# EAGLE board picoslidertoy (EAGLE 9.6.2)
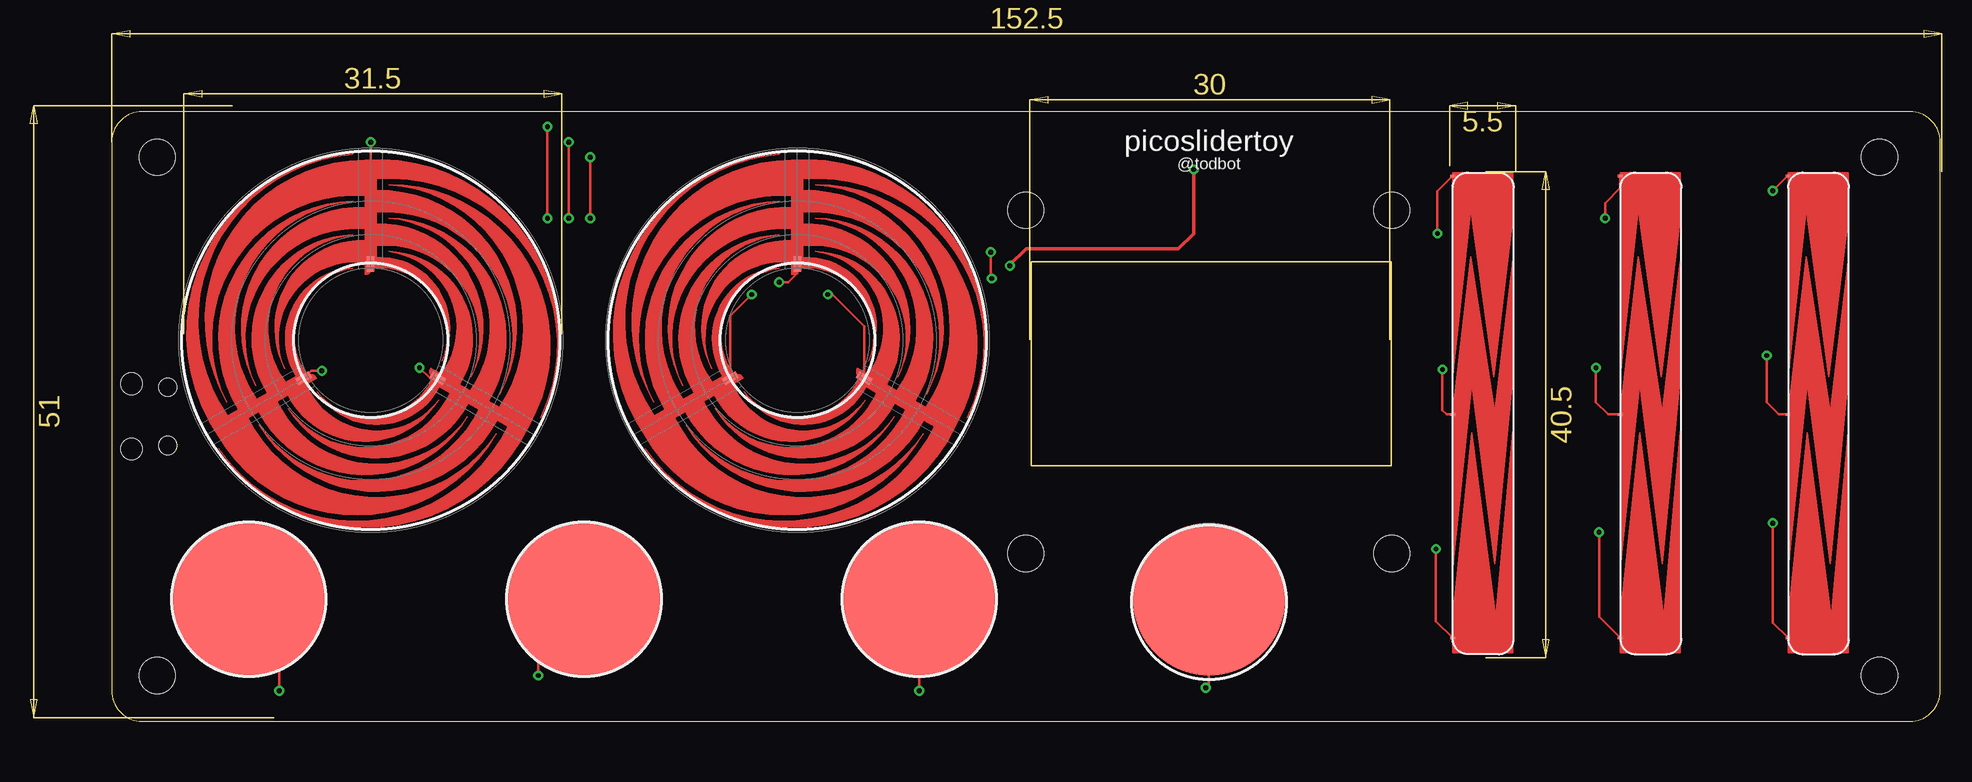
[diagram p0: board, top side]
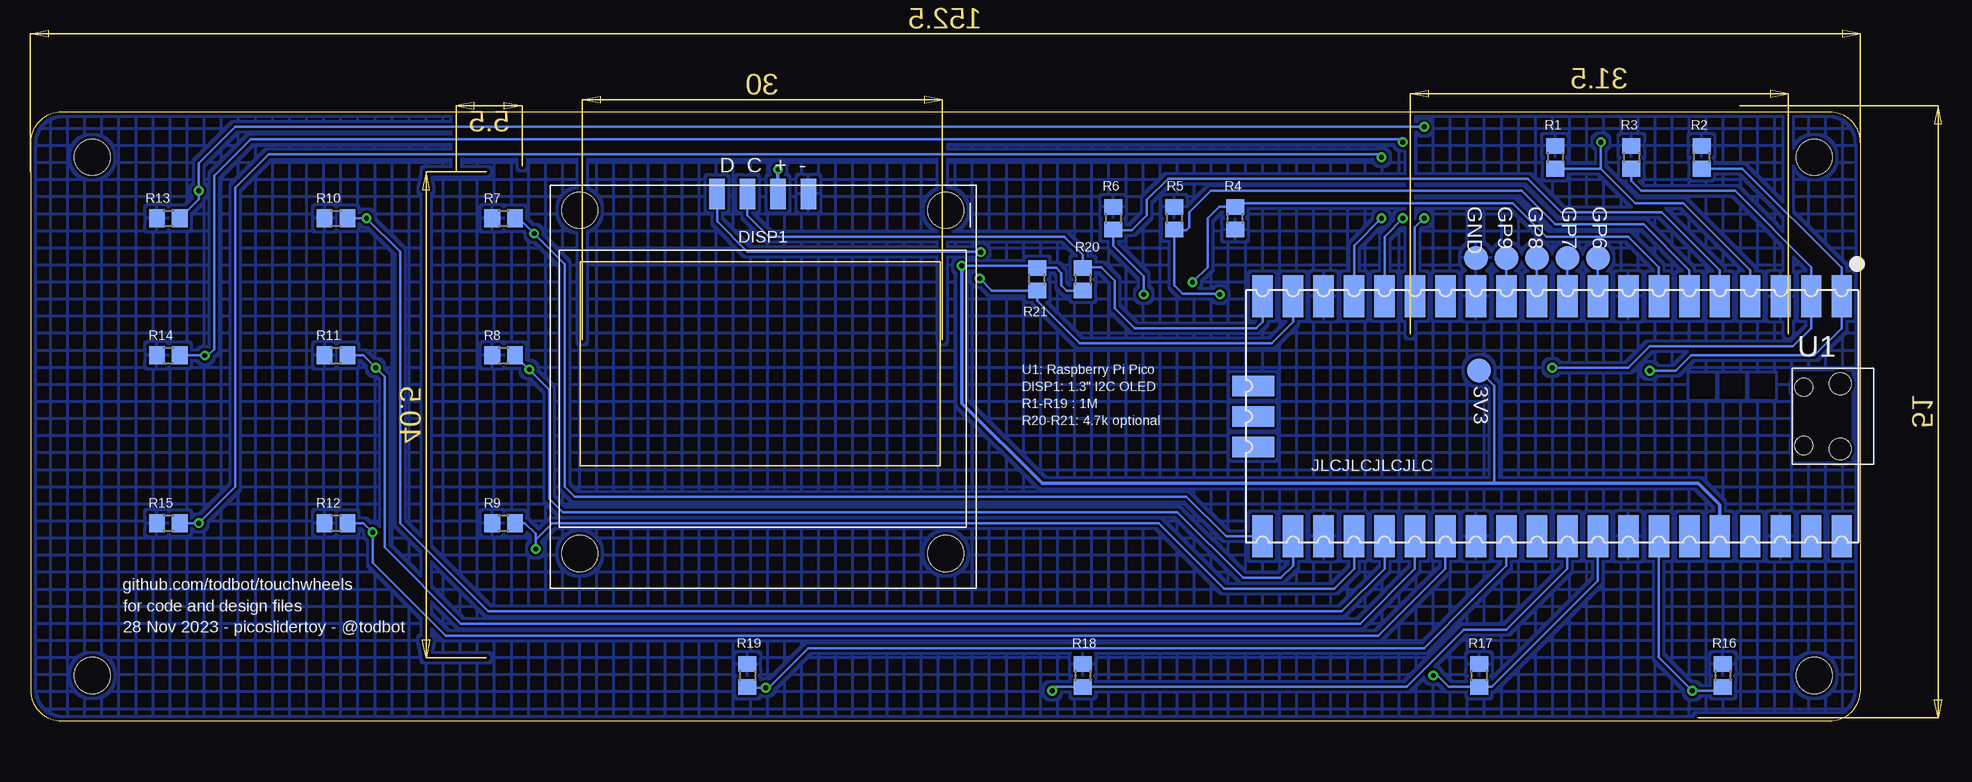
[diagram p1: board, bottom side, seen from below]

Size 152.4 x 50.8 mm. Coordinates in mm from the lower left corner, seen from the top.
Outline: 149.86,50.8 2.54,50.8 arc90 0,48.26 0,2.54 arc90 2.54,0 149.86,0 arc90 152.4,2.54 152.4,48.26 arc90 149.86,50.8
Copper layers (1*16): Top 0.035mm / dielectric 1.5mm / Bottom 0.035mm
Design rules "adafruit-rules-20180530": minimum track width 8mil, minimum drill 16mil, track to track 8mil, track to pad 8mil, pad to pad 8mil, via to via 8mil, smd to smd 8mil, copper to edge 10mil, drill to drill 8mil, minimum pad ring 10mil, minimum via ring 8mil, stop-mask expansion 4mil, vias tented up to drill 20mil, thermal gap 10mil
Holes 3 mm at 147.32,3.81 3.81,46.99 3.81,3.81 147.32,46.99

## Footprints (pad centres in the part's own frame; a part is rotated, then mirrored left to right if it is on the bottom)
TP20R = smd 2 x 2: TP 0,0
R0805 = smd 1.3 x 1.5: 1 -0.95,0; 2 0.95,0
TOUCHSLIDER3_6X40 = smd 0.406 x 0.203: A 0,-0.27; B 0,-20.16; C 0,-38.78
1.3"OLED_SMDBACKONLY = smd 1.27 x 2.54 bottom: GND 0,0.762; SCL 5.08,0.762; SDA 7.62,0.762; VCC 2.54,0.762 | hole 3: 19.05,-0.6; -11.45,-0.6; 19.05,-29.2; -11.45,-29.2
TOUCHROTARY1B = smd 1.27 x 0.635: P0 6.35,0 | smd 1.27 x 0.635 rotated 120: P1 -3.175,5.588 | smd 1.27 x 0.635 rotated 60: P2 -3.175,-5.588
TOUCHPADA_0.5IN = smd 12.7 x 12.7: TP 0,0
PICO-PKG-SMD = smd 3.5 x 1.7: P$1 -10,24.13; P$2 -10,21.59; P$3 -10,19.05; P$4 -10,16.51; P$5 -10,13.97; P$6 -10,11.43; P$7 -10,8.89; P$8 -10,6.35; P$9 -10,3.81; P$10 -10,1.27; P$11 -10,-1.27; P$12 -10,-3.81; P$13 -10,-6.35; P$14 -10,-8.89; P$15 -10,-11.43; P$16 -10,-13.97; P$17 -10,-16.51; P$18 -10,-19.05; P$19 -10,-21.59; P$20 -10,-24.13; P$21 10,-24.13; P$22 10,-21.59; P$23 10,-19.05; P$24 10,-16.51; P$25 10,-13.97; P$26 10,-11.43; P$27 10,-8.89; P$28 10,-6.35; P$29 10,-3.81; P$30 10,-1.27; P$31 10,1.27; P$32 10,3.81; P$33 10,6.35; P$34 10,8.89; P$35 10,11.43; P$36 10,13.97; P$37 10,16.51; P$38 10,19.05; P$39 10,21.59; P$40 10,24.13 | smd 1.7 x 3.5: P$41 -2.54,-24.925; P$42 0,-24.925; P$43 2.54,-24.925 | hole 1.8: -2.725,24; 2.725,24 | hole 1.5: -2.425,20.97; 2.425,20.97

## Placement (x,y rotation side)
3V3  TPTP20R  [TP20R]  31.75,29.21 0 bottom
GND  TPTP20R  [TP20R]  32,38.61 0 bottom
GP6  TPTP20R  [TP20R]  21.84,38.61 0 bottom
GP7  TPTP20R  [TP20R]  24.38,38.61 270 bottom
GP8  TPTP20R  [TP20R]  26.92,38.61 270 bottom
GP9  TPTP20R  [TP20R]  29.46,38.61 270 bottom
R1  1M  [R0805]  25.4,46.99 270 bottom
R2  1M  [R0805]  13.21,46.99 270 bottom
R3  1M  [R0805]  19.05,46.99 270 bottom
R4  1M  [R0805]  52.07,41.91 90 bottom
R5  1M  [R0805]  57.15,41.91 270 bottom
R6  1M  [R0805]  62.23,41.91 270 bottom
R7  1M  [R0805]  113.03,41.91 0 bottom
R8  1M  [R0805]  113.03,30.48 0 bottom
R9  1M  [R0805]  113.03,16.51 0 bottom
R10  1M  [R0805]  127,41.91 0 bottom
R11  1M  [R0805]  127,30.48 0 bottom
R12  1M  [R0805]  127,16.51 0 bottom
R13  1M  [R0805]  140.97,41.91 0 bottom
R14  1M  [R0805]  140.97,30.48 0 bottom
R15  1M  [R0805]  140.97,16.51 0 bottom
R16  1M  [R0805]  11.43,3.81 270 bottom
R17  1M  [R0805]  31.75,3.81 270 bottom
R18  1M  [R0805]  64.77,3.81 270 bottom
R19  1M  [R0805]  92.71,3.81 270 bottom
R20  4.7k  [R0805]  64.77,36.83 270 bottom
R21  4.7k  [R0805]  68.58,36.83 90 bottom
SLIDER1  TOUCHSLIDER36X40  [TOUCHSLIDER3_6X40]  111.76,45.72 0 top
SLIDER2  TOUCHSLIDER36X40  [TOUCHSLIDER3_6X40]  125.73,45.72 0 top
SLIDER3  TOUCHSLIDER36X40  [TOUCHSLIDER3_6X40]  139.7,45.72 0 top
SMDBACK2  13"OLEDSMDONLY  [1.3"OLED_SMDBACKONLY]  87.63,43.18 0 top
TOUCH1  TOUCHROTARY6_30  [TOUCHROTARY1B]  21.59,31.75 90 top
TOUCH2  TOUCHROTARY6_30  [TOUCHROTARY1B]  57.15,31.75 90 top
TP1  TOUCHPADA  [TOUCHPADA_0.5IN]  11.43,10.16 0 top
TP2  TOUCHPADA  [TOUCHPADA_0.5IN]  39.37,10.16 0 top
TP3  TOUCHPADA  [TOUCHPADA_0.5IN]  67.31,10.16 0 top
TP4  TOUCHPADA  [TOUCHPADA_0.5IN]  91.44,10.16 0 top
U1  RASPBERRY_PICOSMD  [PICO-PKG-SMD]  25.65,25.4 270 bottom

## Library data of the parts
3V3 GND GP6-GP9 = testpad
R1-R21 = rcl; SPICEPREFIX: R
SLIDER1-SLIDER3 TOUCH1 TOUCH2 TP1-TP4 = todstuff2023
SMDBACK2 = 13oled
U1 = RpiPico

## Nets
+3V3: 3V3.TP R20.2 R21.2 SMDBACK2.VCC U1.P$36
+5V: U1.P$40
GND: GND.TP R1.1 R2.1 R3.1 R4.1 R5.1 R6.1 R7.1 R8.1 R9.1 R10.1 R11.1 R12.1 R13.1 R14.1 R15.1 R16.1 R17.1 R18.1 R19.1 SMDBACK2.GND U1.P$3 U1.P$8 U1.P$13 U1.P$18 U1.P$23 U1.P$28 U1.P$33 U1.P$38
N$1: GP6.TP U1.P$9
N$2: GP7.TP U1.P$10
N$3: GP9.TP U1.P$12
N$4: GP8.TP U1.P$11
ROTA1: R1.2 TOUCH1.P0 U1.P$4
ROTA2: R2.2 TOUCH1.P1 U1.P$1
ROTA3: R3.2 TOUCH1.P2 U1.P$2
ROTB1: R6.2 TOUCH2.P2 U1.P$5
ROTB2: R5.2 TOUCH2.P1 U1.P$6
ROTB3: R4.2 TOUCH2.P0 U1.P$7
SCL: R20.1 SMDBACK2.SCL U1.P$20
SDA: R21.1 SMDBACK2.SDA U1.P$19
SLIDEA1: R7.2 SLIDER1.A U1.P$21
SLIDEA2: R8.2 SLIDER1.B U1.P$22
SLIDEA3: R9.2 SLIDER1.C U1.P$24
SLIDEB1: R10.2 SLIDER2.A U1.P$25
SLIDEB2: R11.2 SLIDER2.B U1.P$26
SLIDEB3: R12.2 SLIDER2.C U1.P$27
SLIDEC1: R15.2 SLIDER3.C U1.P$17
SLIDEC2: R14.2 SLIDER3.B U1.P$16
SLIDEC3: R13.2 SLIDER3.A U1.P$15
SWGND: U1.P$42
TPAD1: R16.2 TP1.TP U1.P$34
TPAD2: R17.2 TP2.TP U1.P$32
TPAD3: R18.2 TP3.TP U1.P$31
TPAD4: R19.2 TP4.TP U1.P$29
VSYS: U1.P$39

## Tracks (layer width: path | path; a pad name or v marks a point on that pad's centre or on a via)
+3V3  (via drill 0.41)
  Top 0.305: v74.86,37.95 74.86,38.03 76.2,39.37 88.9,39.37 90.17,40.64 v90.17,45.97
  Bottom 0.203: 90.17,43.18 SMDBACK2.VCC | 30.48,19.81 30.48,20.32 30.48,27.94 3V3.TP | v74.86,37.95 68.75,37.95 R21.2 66.99,37.78 66.55,37.34 66.55,36.32 66.11,35.88 R20.2
  Bottom 0.305: U1.P$36 11.68,18.03 13.46,19.81 30.48,19.81 68.16,19.81 74.86,26.51 v74.86,37.95 | v90.17,45.97 90.17,43.18
GND
  pour Bottom (hatched): 162.31,65.08 -14.04,65.08 -14.04,-1.27 162.31,-1.27
N$1
  Bottom 0.203: GP6.TP U1.P$9
N$2
  Bottom 0.203: GP7.TP U1.P$10
N$3
  Bottom 0.203: U1.P$12 GP9.TP
N$4
  Bottom 0.203: GP8.TP U1.P$11
ROTA1  (via drill 0.41)
  Top 0.203: TOUCH1.P0 v21.59,48.26
  Bottom 0.203: U1.P$4 9.14,37.59 14.73,43.18 18.73,43.18 21.59,46.04 | R1.2 21.59,46.04 | v21.59,48.26 21.59,46.04
ROTA2  (via drill 0.41)
  Top 0.203: TOUCH1.P1 16.64,29.21 v17.53,29.21
  Bottom 0.203: U1.P$1 1.52,35.56 U1.P$1 | R2.2 9.79,46.04 1.52,37.77 U1.P$1 | U1.P$1 1.52,32.77 3.81,30.48 14.08,30.48 15.35,29.21 v17.53,29.21
ROTA3  (via drill 0.41)
  Top 0.203: TOUCH1.P2 26.54,28.57 v25.65,29.46
  Bottom 0.203: v25.65,29.46 19.3,29.46 17.53,31.24 15.24,31.24 5.59,31.24 4.06,32.77 U1.P$2 4.06,37.85 10.41,44.2 18.22,44.2 19.05,45.02 R3.2
ROTB1  (via drill 0.41)
  Top 0.203: TOUCH2.P2 62.74,32.89 60.07,35.56 v59.69,35.56
  Bottom 0.203: v59.69,35.56 59.69,37.08 62.23,39.62 R6.2 62.16,40.89 60.71,40.89 59.44,42.16 59.44,43.43 57.66,45.21 27.69,45.21 24.89,42.42 16.51,42.42 11.68,37.59 U1.P$5
ROTB2  (via drill 0.41)
  Top 0.203: TOUCH2.P1 51.56,33.78 v53.34,35.56
  Bottom 0.203: U1.P$6 14.22,37.59 18.03,41.4 25.4,41.4 28.19,44.2 40.39,44.2 54.1,44.2 55.88,42.42 55.88,41.15 56.13,40.89 57.15,40.89 R5.2 57.15,36.33 56.43,35.61 53.39,35.61 v53.34,35.56
ROTB3  (via drill 0.41)
  Top 0.203: v55.63,36.58 56.39,36.58 57.15,37.34 TOUCH2.P0
  Bottom 0.203: U1.P$7 16.76,37.85 19.3,40.39 26.16,40.39 28.96,43.18 51.75,43.18 R4.2 53.41,42.86 54.36,41.91 54.36,37.85 v55.63,36.58
SCL
  Bottom 0.203: U1.P$20 49.78,33.27 50.29,32.77 60.45,32.77 62.1,34.42 62.1,36.7 63.25,37.85 64.77,37.85 | SMDBACK2.SCL 92.71,43.18 92.71,42.16 90.93,40.39 66.29,40.39 64.77,38.86 64.77,37.85 | 64.77,37.85 R20.1
SDA  (via drill 0.41)
  Top 0.203: v73.27,39.09 73.27,36.98 v73.36,36.89
  Bottom 0.203: U1.P$19 47.24,33.27 49.01,31.5 65.03,31.5 68.58,35.05 R21.1 72.34,35.88 v73.36,36.89 | SMDBACK2.SDA 95.25,43.18 95.25,41.66 92.71,39.12 73.29,39.12 v73.27,39.09
SLIDEA1  (via drill 0.41)
  Top 0.203: SLIDER1.A 110.49,44.18 v110.49,40.64
  Bottom 0.203: R7.2 111.76,41.91 v110.49,40.64 107.95,38.1 107.95,19.56 107.09,18.7 56.13,18.7 52.83,15.4 U1.P$21
SLIDEA2  (via drill 0.41)
  Top 0.203: v110.9,29.3 110.9,25.91 111.25,25.56 SLIDER1.B
  Bottom 0.203: R8.2 v110.9,29.3 109.22,27.62 109.22,18.54 108.1,17.42 56.9,17.42 51.41,11.94 48.26,11.94 47.24,12.95 U1.P$22
SLIDEA3  (via drill 0.41)
  Top 0.203: v110.36,14.35 110.36,8.34 SLIDER1.C
  Bottom 0.203: R9.2 111.25,16.51 110.36,15.62 v110.36,14.35 110.36,15.11 108.97,16.51 58.42,16.51 52.96,11.05 43.81,11.05 42.16,12.7 U1.P$24
SLIDEB1  (via drill 0.41)
  Top 0.203: SLIDER2.A 125.73,44.43 124.46,43.16 v124.46,41.91
  Bottom 0.203: R10.2 v124.46,41.91 121.67,39.12 121.67,16.51 114.3,9.14 43.18,9.14 39.62,12.7 U1.P$25
SLIDEB2  (via drill 0.41)
  Top 0.203: SLIDER2.B 124.71,25.56 123.7,26.58 v123.7,29.46
  Bottom 0.203: R11.2 124.71,30.48 v123.7,29.46 122.94,28.7 122.94,14.48 116.59,8.13 41.66,8.13 37.08,12.7 U1.P$26
SLIDEB3  (via drill 0.41)
  Top 0.203: v123.95,15.75 123.95,8.72 SLIDER2.C
  Bottom 0.203: R12.2 124.71,16.51 v123.95,15.75 123.95,13.21 117.86,7.11 40.13,7.11 34.54,12.7 U1.P$27
SLIDEC1  (via drill 0.41)
  Top 0.203: v39.88,41.91 39.88,45.47 v39.88,46.99 | v138.43,16.51 138.43,8.21 SLIDER3.C
  Bottom 0.203: U1.P$17 42.16,39.62 v39.88,41.91 | v39.88,46.99 40.13,47.24 132.59,47.24 135.38,44.45 135.38,19.56 v138.43,16.51 R15.2
SLIDEC2  (via drill 0.41)
  Top 0.203: v38.1,48.26 v38.1,41.91 | SLIDER3.B 138.94,25.56 137.92,26.58 v137.92,30.48
  Bottom 0.203: U1.P$16 39.62,40.39 v38.1,41.91 | R14.2 v137.92,30.48 137.67,30.48 137.16,30.99 137.16,45.47 134.11,48.51 38.35,48.51 v38.1,48.26
SLIDEC3  (via drill 0.41)
  Top 0.203: v36.32,49.53 v36.32,41.91 | SLIDER3.A 139.68,45.45 v138.43,44.2
  Bottom 0.203: R13.2 138.43,43.5 v138.43,44.2 138.43,46.48 135.38,49.53 v36.32,49.53 | v36.32,41.91 37.08,41.15 U1.P$15
TPAD1  (via drill 0.41)
  Top 0.203: TP1.TP 13.97,7.62 v13.97,2.54
  Bottom 0.203: R16.2 11.75,2.54 v13.97,2.54 16.76,5.33 U1.P$34
TPAD2  (via drill 0.41)
  Top 0.203: TP2.TP 39.37,9.91 35.56,6.1 v35.56,3.81
  Bottom 0.203: v35.56,3.81 35.24,3.81 34.29,2.86 R17.2 30.67,2.86 21.84,11.68 U1.P$32
TPAD3  (via drill 0.41)
  Top 0.203: TP3.TP v67.31,2.54
  Bottom 0.203: v67.31,2.54 66.99,2.86 R18.2 37.78,2.86 33.02,7.62 29.46,7.62 24.38,12.7 U1.P$31
TPAD4  (via drill 0.41)
  Top 0.203: TP4.TP 91.44,3.05 v91.19,2.79
  Bottom 0.203: U1.P$29 29.46,12.95 32.26,10.16 36.32,6.1 87.63,6.1 90.93,2.79 v91.19,2.79 92.64,2.79 R19.2

## Text on the board
tPlace: picoslidertoy | @todbot
bPlace: D C + - | DISP1 | U1: Raspberry Pi Pico / DISP1: 1.3" I2C OLED / R1-R19 : 1M / R20-R21: 4.7k optional | JLCJLCJLCJLC
bNames: github.com/todbot/touchwheels / for code and design files / 28 Nov 2023 - picoslidertoy - @todbot